# Allegro board TIE_P25.brd
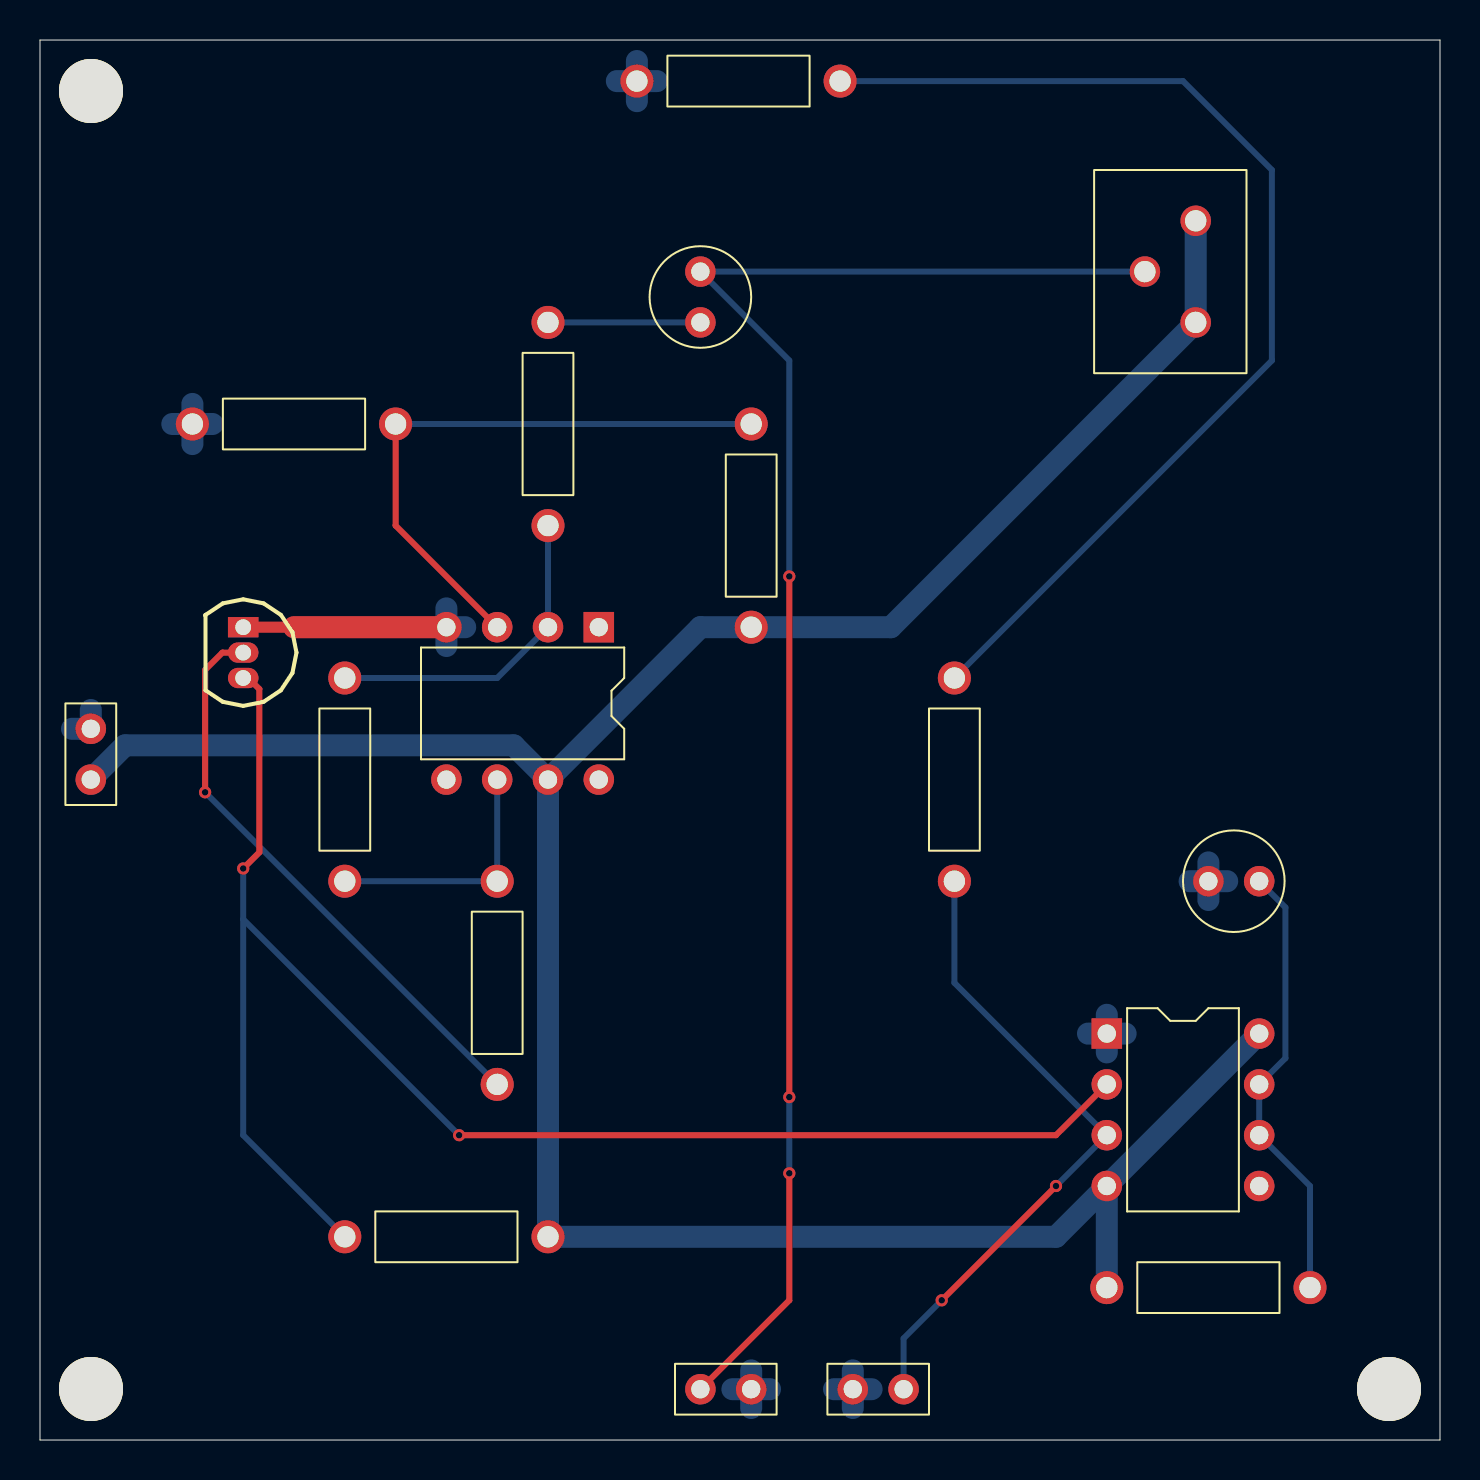
[diagram p0: board, top side]
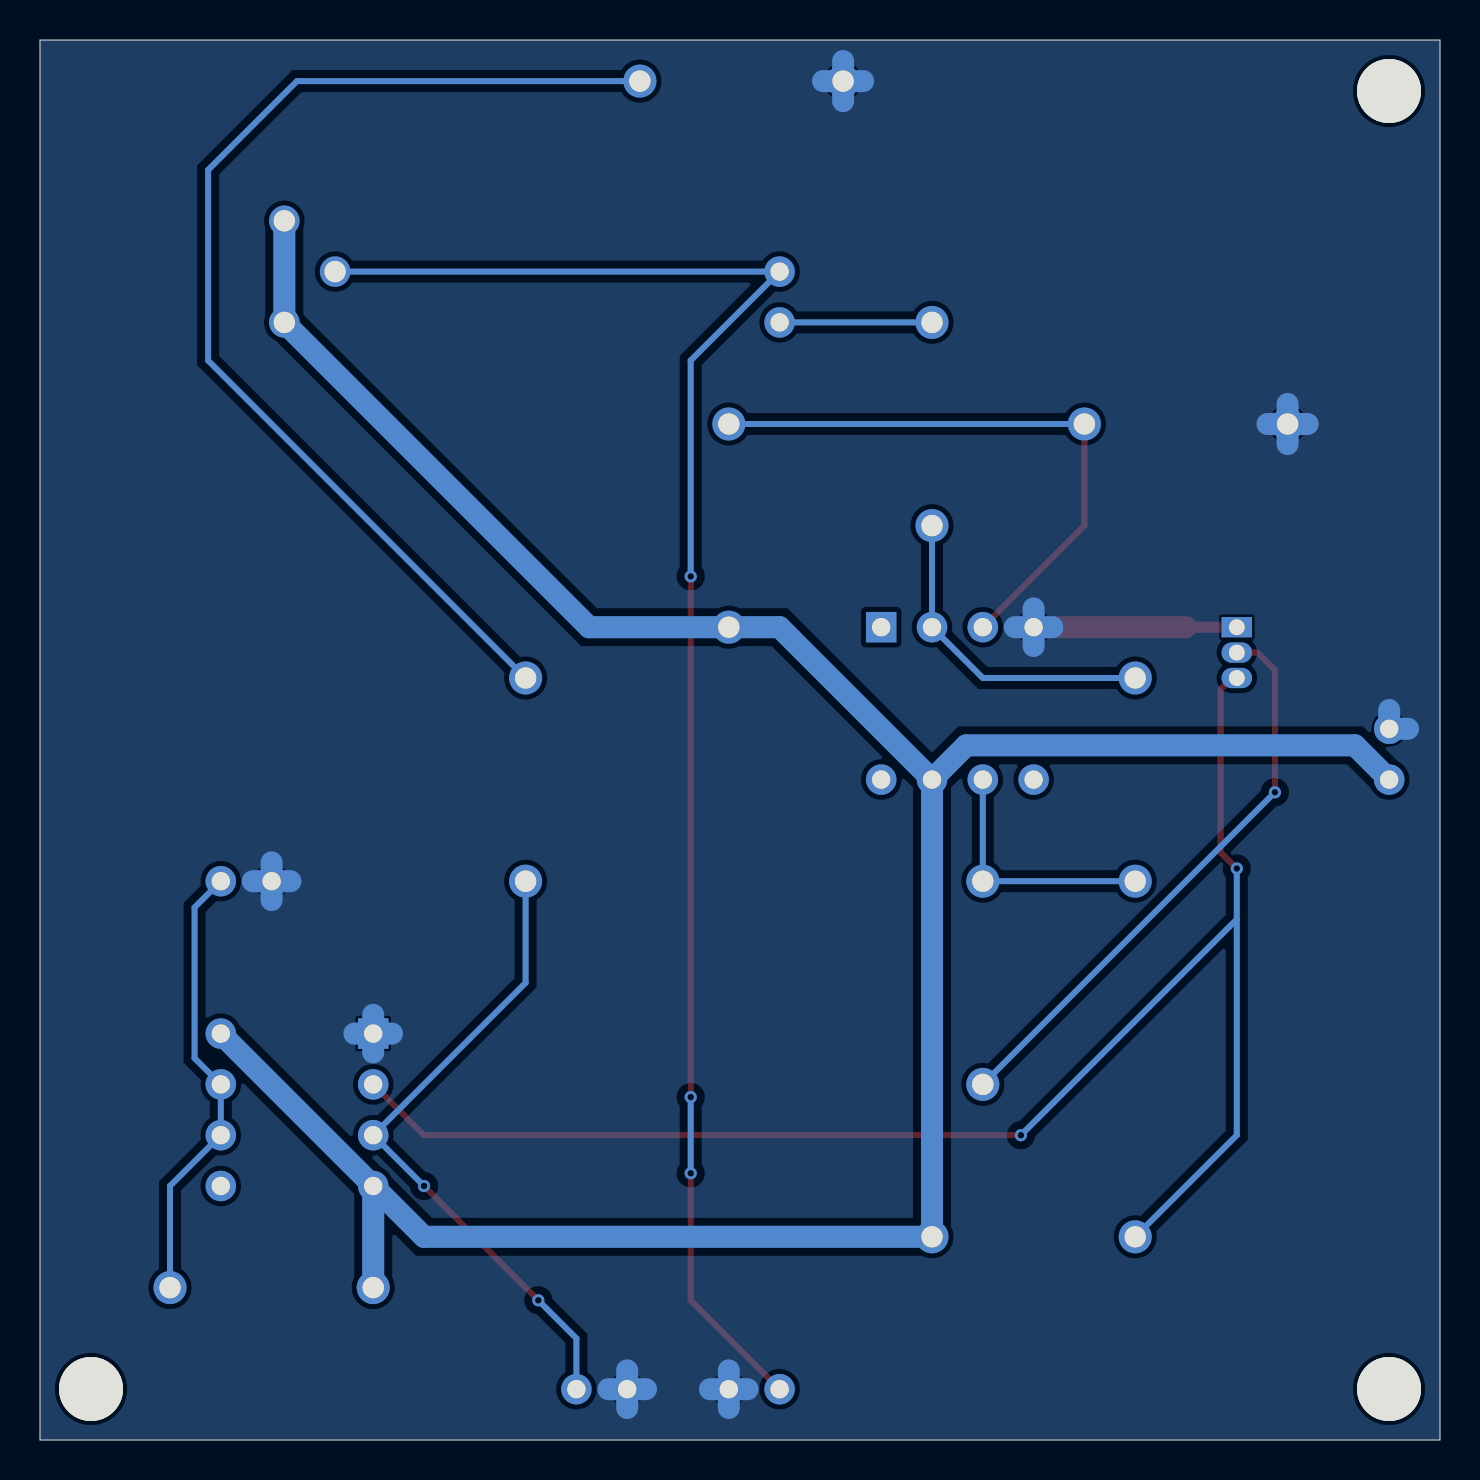
[diagram p1: board, bottom side, seen from below]

Outline 70 x 70 mm; copper layers: TOP, BOTTOM. Coordinates in mm from the lower left corner of the outline.
Outline path: 0,70 0,0 70,0 70,70 0,70

## Design rules (mm)
constraint set DEFAULT: min track width 0.3

## Placement (name value [footprint] x y rotation side)
C1  0.22uF  [CAP196]  33.02 58.42 180 top
C2  100uF/16V  [CAP196]  60.96 27.94 90 top
D1  LED  [RES400]  40.01 67.94 90 top
IC1  LM741  [DIP8_3]  27.94 40.64 270 top
IC2  NE555  [DIP8_3]  53.34 20.32 0 top
J1  Power  [JUMPER2]  2.54 33.02 90 top
J2  Buzzer  [JUMPER2]  43.18 2.54 180 top
J3  Piezo element  [JUMPER2]  33.02 2.54 0 top
NOREF  -  []  70 0 90 top
NOREF#2  -  [unnamed#2]  2.55 67.45 0 top
NOREF#3  -  [unnamed#2]  67.45 2.55 0 top
NOREF#4  -  [unnamed#2]  2.55 2.55 0 top
NOREF#5  -  []  0 0 0 top
R1  12k  [RES400]  25.4 55.88 180 top
R2  12k  [RES400]  35.56 40.64 0 top
R3  4.7k  [RES400]  17.78 50.8 90 top
R4  1M  [RES400]  15.24 38.1 180 top
R5  150k  [RES400]  22.86 27.94 180 top
R6  1k  [RES400]  25.4 10.16 90 top
R7  100  [RES400]  45.72 27.94 0 top
R8  100k  [RES400]  53.34 7.62 270 top
T1  BC548  [TO92]  10.16 40.64 270 top
VR1  10k  [POT]  57.78 55.88 90 top

## Library data of the parts
C1 = CAP NP: Tolerance: ***; User Part Number: ***
C2 = CAP POL: Tolerance: ***; User Part Number: ***
D1 = LED: Tolerance: ***; User Part Number: ***
IC1 = LM741: Tolerance: ***; User Part Number: ***
IC2 = NE555_1: Tolerance: ***; User Part Number: ***
J1-J3 = CON2: User Part Number: ***
R1-R8 = R: Tolerance: ***; User Part Number: ***
T1 = BC548
VR1 = POT: User Part Number: ***

## Footprints (pads in the part's own frame, mm; a bottom-side part is the same pattern mirrored in y, then rotated)
CAP196
  round 1.524 hole 0.914: 1(0,0) 2(0,2.54)
DIP8_3
  rect 1.524x1.524 hole 0.914: 1(0,0)
  round 1.524 hole 0.914: 2(0,-2.54) 3(0,-5.08) 4(0,-7.62) 5(7.62,-7.62) 6(7.62,-5.08) 7(7.62,-2.54) 8(7.62,0)
JUMPER2
  round 1.524 hole 0.914: 1(0,0) 2(2.54,0)
POT
  round 1.524 hole 1.067: 1(0,0) 2(5.08,0) 3(2.54,2.54)
RES400
  round 1.651 hole 1.067: 1(0,0) 2(0,10.16)
TO92
  rect 1.016x1.524 hole 0.787: 1(0,0)
  oval 1.016x1.524 hole 0.787: 2(1.27,0) 3(2.54,0)
unnamed#2
  round 3.2 hole 3.2 unplated: (0,0)

## Nets
GND: C2.2 D1.2(CATHODE) IC1.4(V-) IC2.1 J1.2 J2.2 J3.2 R3.2 T1.1(EMITTER)
VCC: IC1.7 IC2.4 IC2.8(VCC) J1.1 R2.1 R6.1 R8.1 VR1.1 VR1.2(WIPER)
N00169: C1.1 J3.1 VR1.3
N00176: C1.2 R1.1
N00180: IC1.2 R1.2 R4.1
N00424: IC1.3 R2.2 R3.1
N00634: IC1.6 R4.2 R5.1
N00680: R5.2 T1.2
N00765: IC2.2 R6.2 T1.3
N01340: D1.1 R7.2
N01344: IC2.3 J2.1 R7.1
N01696: C2.1 IC2.6 IC2.7 R8.2

Pads without a net: IC1 1 5 8; IC2 5

## Via types
v1: diameter 0.61, hole 0.33, TOP to BOTTOM, 8 vias

## Routing (per net, layer and track width the routed paths; a pad name or vN(x,y) marks a point on that pad's centre or on a via; arc(x,y) is an arc through that point)
GND: length 38.9
  TOP w0.55: 12.7,40.64 T1.1
  TOP w1.1: IC1.4 12.7,40.64
  BOTTOM w1.1: 2.54,36.5 J1.2 1.6,35.56 ; IC1.4 20.32,41.58 ; IC1.4 20.32,39.7 ; IC1.4 21.26,40.64 ; IC1.4 19.38,40.64 ; 35.56,1.6 J3.2 ; J3.2 36.5,2.54 ; J3.2 34.62,2.54 ; J3.2 35.56,3.48 ; 53.34,19.38 IC2.1 ; IC2.1 52.4,20.32 ; IC2.1 54.28,20.32 ; IC2.1 53.34,21.26 ; 40.64,1.6 J2.2 ; J2.2 39.7,2.54 ; J2.2 41.58,2.54 ; J2.2 40.64,3.48 ; 29.84,66.94 29.84,67.94 ; 29.84,67.94 30.85,67.94 ; 29.84,67.94 29.84,68.95 ; 29.84,67.94 28.84,67.94 ; C2.2 58.42,28.88 ; C2.2 58.42,27 ; C2.2 59.36,27.94 ; C2.2 57.48,27.94 ; 6.62,50.8 R3.2 ; R3.2 7.62,49.8 ; R3.2 7.62,51.8 ; R3.2 8.62,50.8
VCC: length 138.9
  BOTTOM w1.1: IC2.4 IC2.8 ; IC2.4 50.8,10.16 R6.1 IC1.7 ; IC2.4 R8.1 ; IC1.7 23.69,34.73 4.25,34.73 J1.1 ; IC1.7 33.02,40.64 R2.1 42.55,40.64 VR1.1 VR1.2
N00169: length 81.8
  TOP w0.3: v1(37.47,13.34) 37.47,6.99 J3.1 ; v1(37.47,43.18) v1(37.47,17.14)
  BOTTOM w0.3: v1(37.47,17.14) v1(37.47,13.34) ; VR1.3 C1.1 37.47,53.98 v1(37.47,43.18)
N00176: length 7.6
  BOTTOM w0.3: R1.1 C1.2
N00180: length 16.3
  BOTTOM w0.3: R1.2 IC1.2 22.86,38.1 R4.1
N00424: length 30
  TOP w0.3: R3.1 17.78,45.72 IC1.3
  BOTTOM w0.3: R3.1 R2.2
N00634: length 12.7
  BOTTOM w0.3: IC1.6 R5.1 R4.2
N00680: length 29
  TOP w0.3: T1.2 9.12,39.37 8.26,38.5 v1(8.26,32.38)
  BOTTOM w0.3: v1(8.26,32.38) R5.2
N00765: length 79.6
  TOP w0.3: v1(10.16,28.57) 10.97,29.38 10.97,37.54 10.41,38.1 T1.3 ; v1(20.95,15.24) 50.8,15.24 IC2.2
  BOTTOM w0.3: v1(10.16,28.57) 10.16,26.04 ; 10.16,26.04 v1(20.95,15.24) ; 10.16,26.04 10.16,15.24 R6.2
N01340: length 55.4
  BOTTOM w0.3: R7.2 61.59,53.98 61.59,63.5 57.15,67.94 D1.1
N01344: length 32.8
  TOP w0.3: v1(45.09,6.99) v1(50.8,12.7)
  BOTTOM w0.3: v1(45.09,6.99) 43.18,5.08 J2.1 ; v1(50.8,12.7) IC2.3 45.72,22.86 R7.1
N01696: length 22.5
  BOTTOM w0.3: C2.1 62.27,26.63 62.27,19.09 IC2.7 IC2.6 63.5,12.7 R8.2

## Copper pours and planes (outline as drawn; the poured copper is in the pictures)
GND on BOTTOM: 70,0 70,70 0,70 0,0

## Text on the board
XSECTION_CHART: *  SURFACE | L1 TOP CONDUCTOR | *  DIELECTRIC | L2 BOTTOM CONDUCTOR | DESIGN CROSS SECTION CHART | ___________________________ | TOTAL THICKNESS 0.26416 MM | 1-2
DIMENSION: Earthquake Detector Circuit | Negrut Vlad, Razvan Militaru, Solomon Teodor, Miron Radu | Scara 1:1, Unintati: mm | FIGURE | FINISHED_SIZE | 0.3302 | 0.7874 | 0.9144 | 1.0668 | 3.2 | DRILL CHART: TOP to BOTTOM | ALL UNITS ARE IN MILLIMETERS | PLATED | NON-PLATED | QTY | 8 | 3 | 26 | 21
